# Altium PCB Encoder.PcbDoc
Units mm, origin at the board's own origin, x right, y up, seen from the top; angles counter-clockwise.
Board outline 80 x 70 mm, 2 copper layers (Top Layer, Bottom Layer), stack 1.671 mm thick; 17 components, 18 nets, 82 pads, 11 vias.
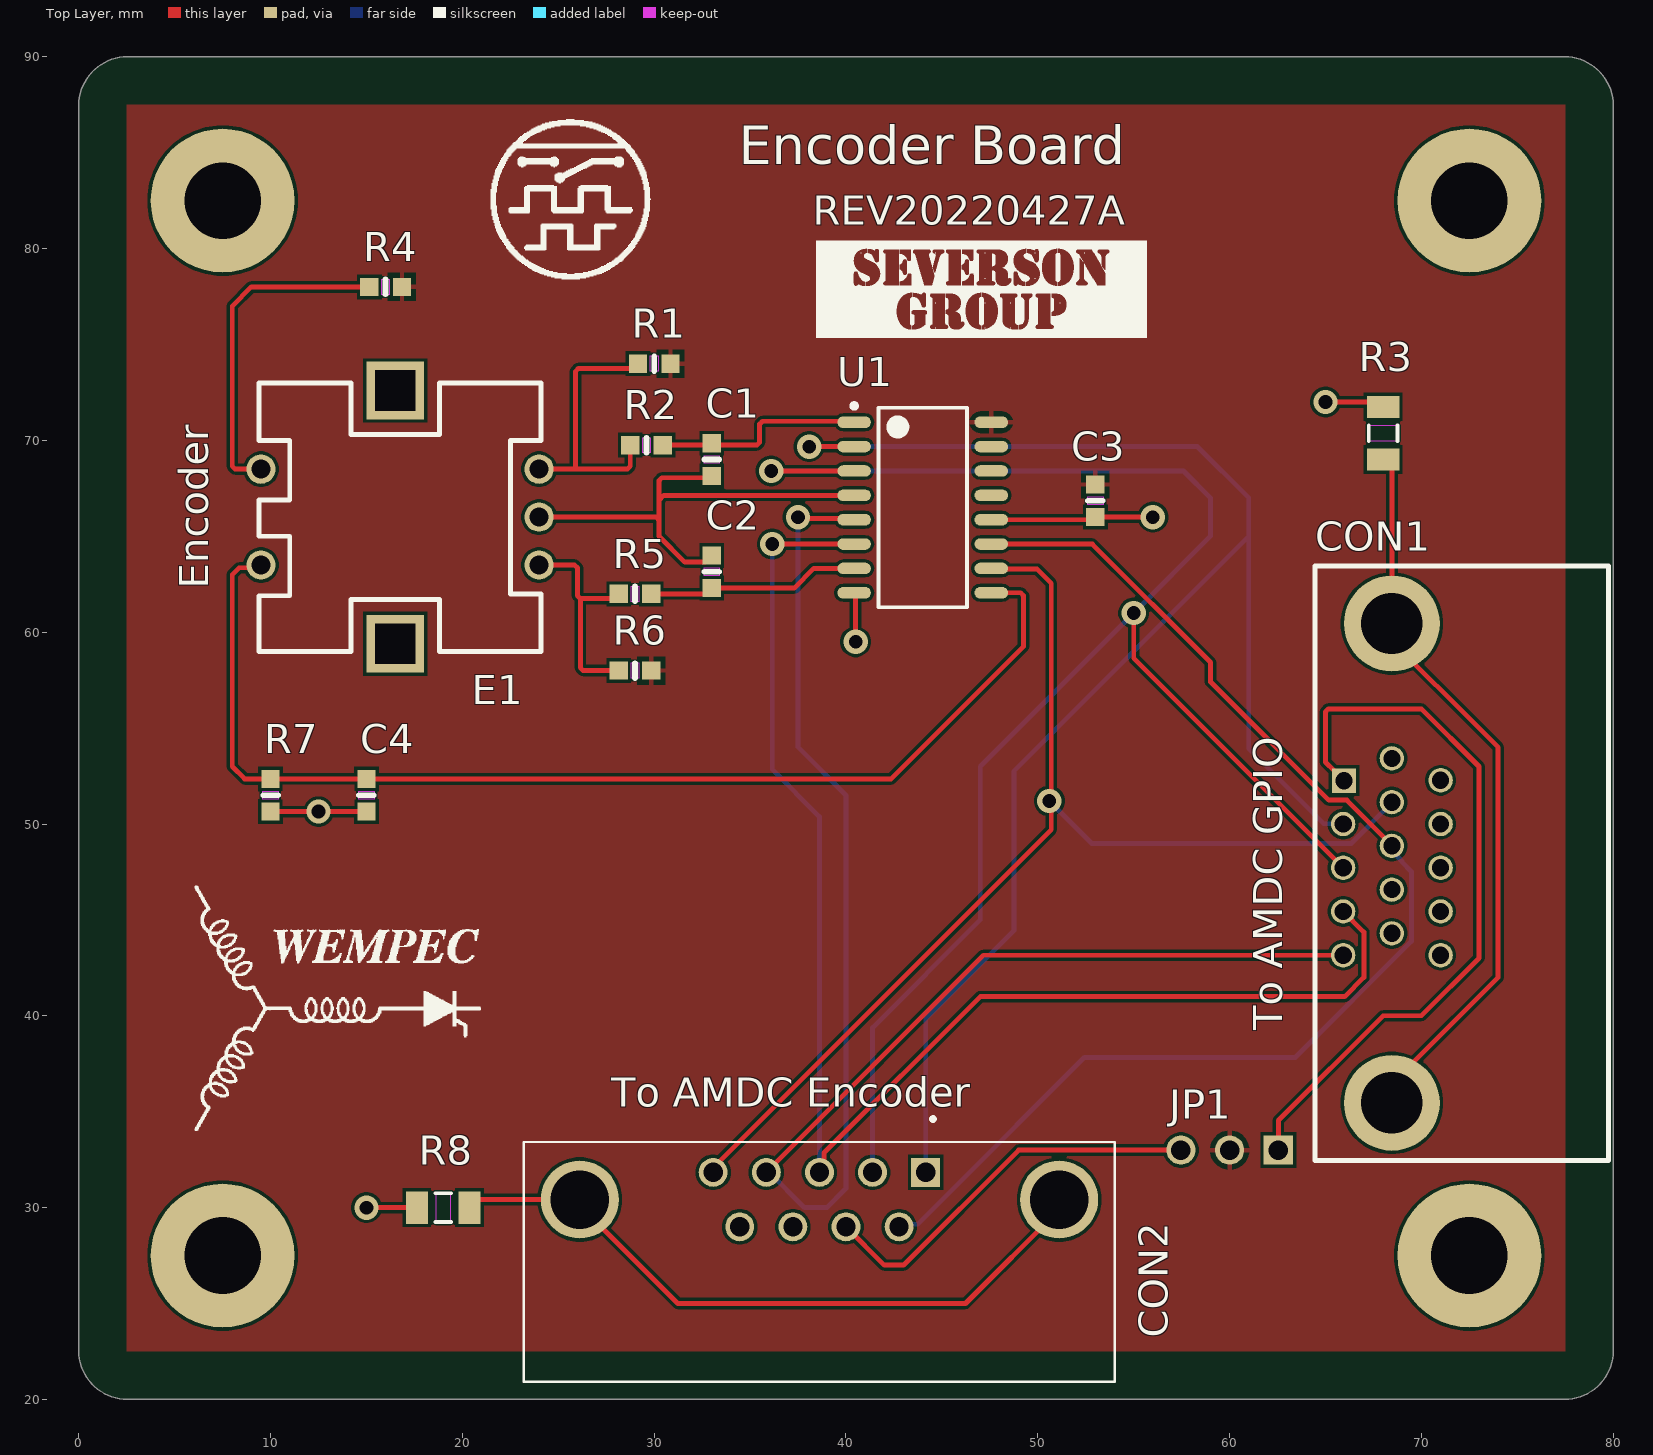
[diagram p0: Top Layer view]
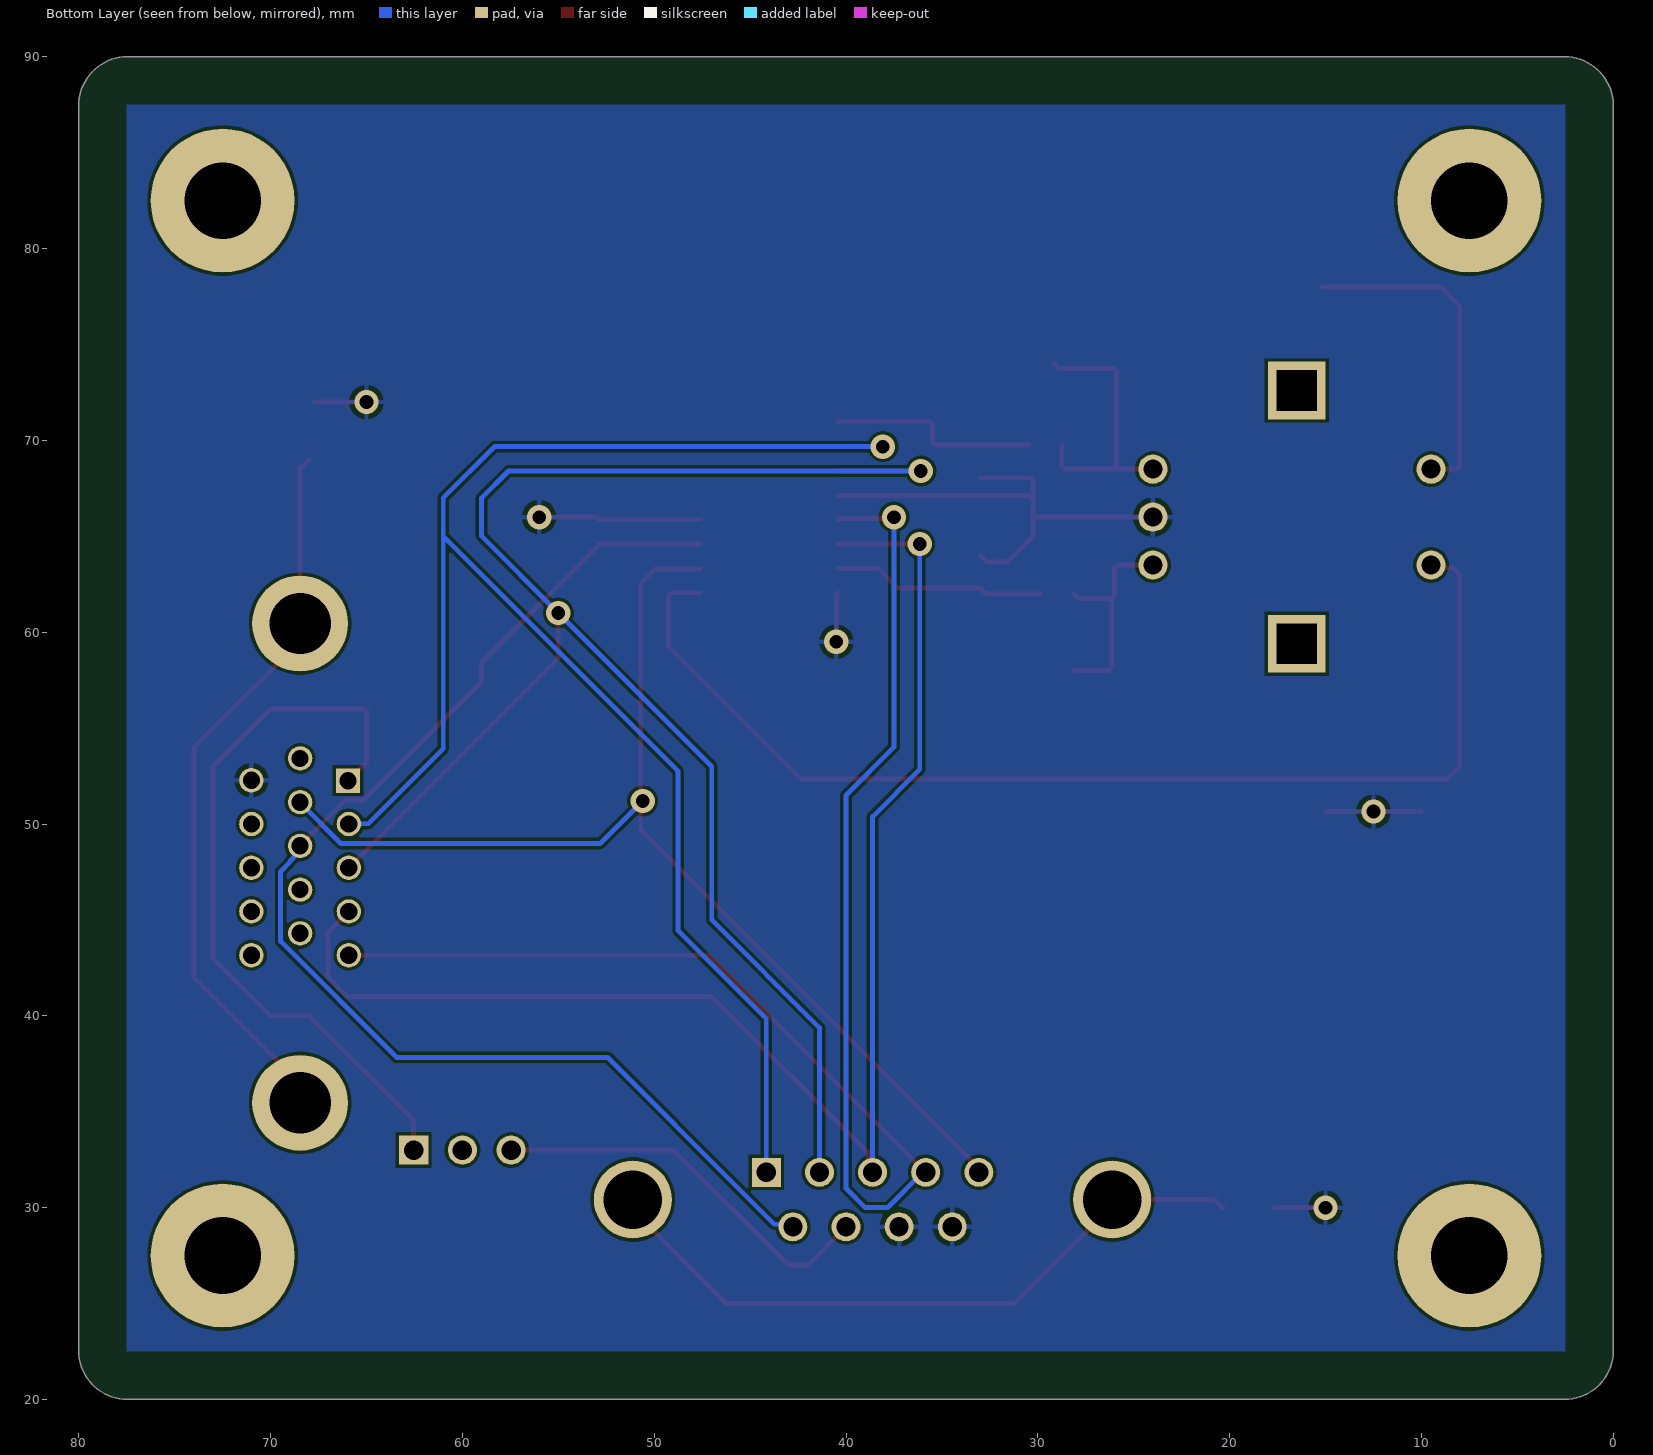
[diagram p1: Bottom Layer view, seen from below]
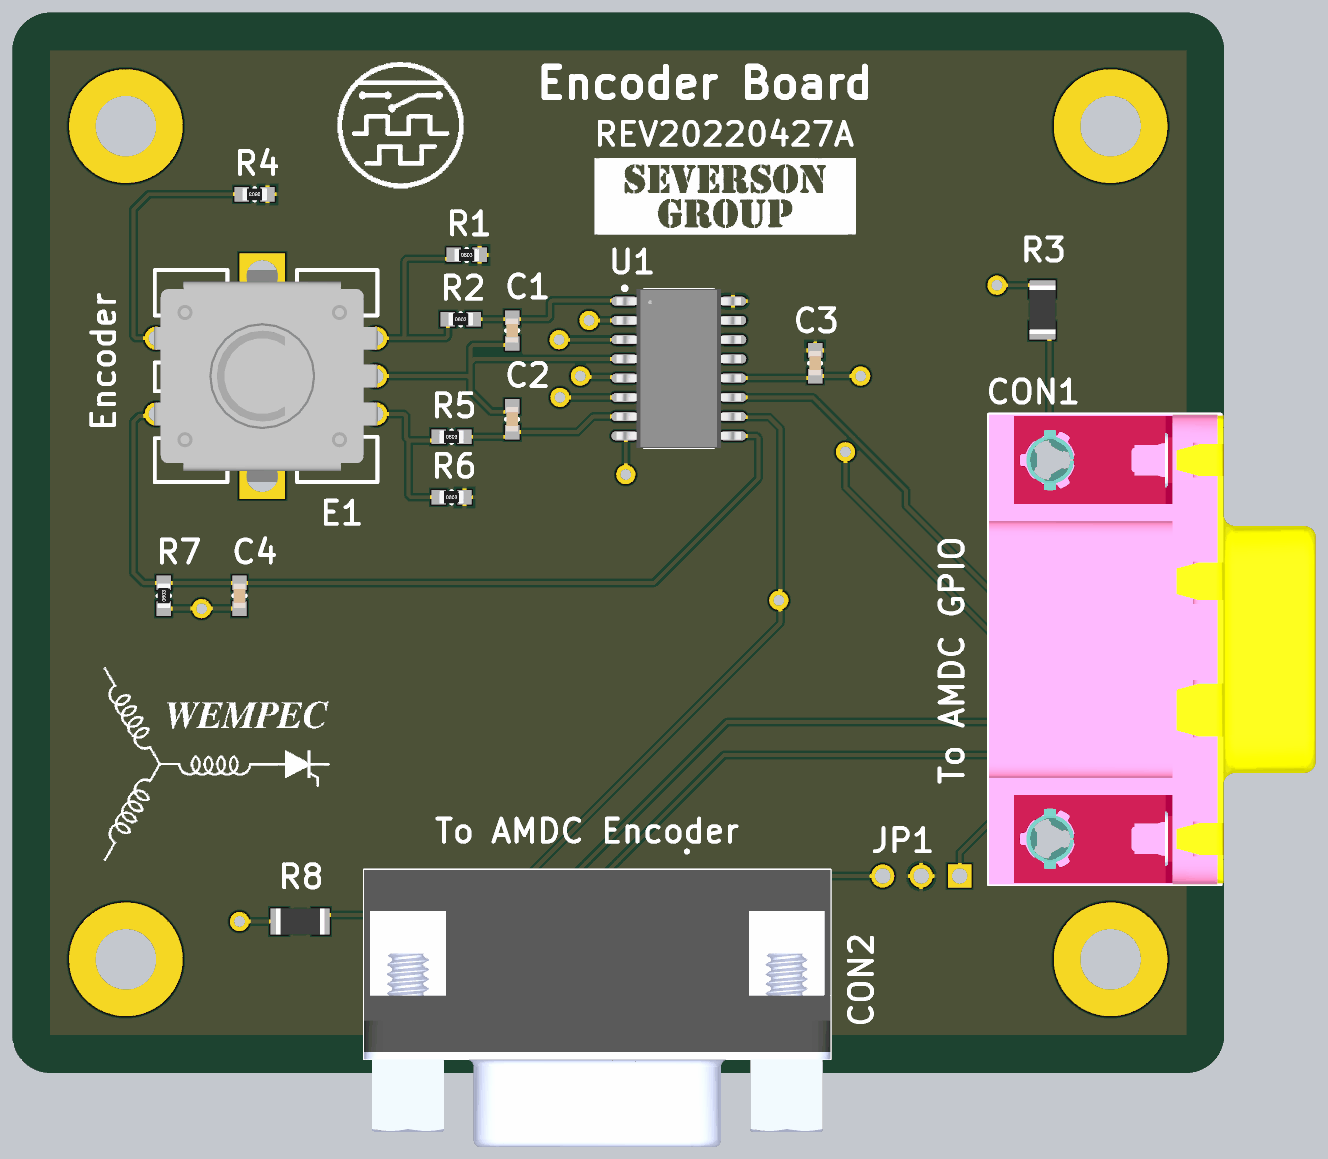
[diagram p2: 3D render of the assembled board from above, using the file's embedded part models]

## Layer stack, top to bottom
Top Solder: solder mask 0.0102, Solder Resist, Dk 3.5
Top Layer: signal copper 0.0356
Dielectric 1: dielectric 1.6, FR-4, Dk 4.8
Bottom Layer: signal copper 0.0356
Bottom Solder: solder mask 0.0102, Solder Resist, Dk 3.5

## Board outline
0,22.54 ccw(c2.54,22.54) 2.54,20 77.46,20 ccw(c77.46,22.54) 80,22.54 80,87.46 ccw(c77.46,87.46) 77.46,90 2.54,90 ccw(c2.54,87.46) 0,87.46

## Design rules (kind name [scope] priority, off if disabled: settings)
Clearance [All] p1: gap=0.16 ignorepadtopadclearanceinfootprint=FALSE
HoleSize [All] p1: absolutevalues=TRUE maxlimit=5 minlimit=0.025 maxpercent=80.000 minpercent=20.000
PolygonConnect [All] p1: connectstyle=Relief reliefconductorwidth=0.254 reliefentries=4 polygonreliefangle="90 Angle" airgapwidth=0.254
RoutingVias [All] p1: holewidth=0.3 width=0.6 viastyle="Through Hole" minholewidth=0.3 minwidth=0.6 maxholewidth=0.3 maxwidth=0.6
SilkToSolderMaskClearance [IsPad] p1: minsilkscreentomaskgap=0.128 clearancetoexposedcopper=TRUE
SolderMaskExpansion [All] p1: expansion=0.102 istentingtop=FALSE
Width [All] p1: maxlimit=0.254 minlimit=0.254 preferedwidth=0.254
28 further rules are at their usual default settings.

## Components (designator, comment, footprint, x,y, rotation, side; value= is the part's Value field where it differs from the comment)
C1 "Capacitor .1uF" ".1uF Capacitor (0603-CAP)" 33,69 r90 top
C2 "Capacitor .1uF" ".1uF Capacitor (0603-CAP)" 33,63.15 r90 top
C3 "Capacitor .1uF" ".1uF Capacitor (0603-CAP)" 53,66.85 r270 top
C4 "Capacitor .1uF" ".1uF Capacitor (0603-CAP)" 15,51.5 r270 top
CON1 "ICD15S13E6GX00LF" ICD15S 68.46,47.955 r90 top
CON2 "A-DF 09 A/KG-T2S" "DB9 Connector" 38.615,30.42 r0 top
E1 "PEC12R" Encoder 16.5,66 r90 top
JP1 "Jumper3" PIN_HEADER_1X3 60,33 r180 top
R1 "Resistor" "10K Resistor (0603-RES)" 30,74 r0 top
R2 "Resistor" "10K Resistor (0603-RES)" 29.6,69.75 r0 top
R3 "Resistor" "0 Resistor (1206-RES)" 68,70.375 r90 top
R4 "Resistor" "10K Resistor (0603-RES)" 16,78 r180 top
R5 "Resistor" "10K Resistor (0603-RES)" 29,62 r0 top
R6 "Resistor" "10K Resistor (0603-RES)" 29,58 r0 top
R7 "Resistor" "100K Resistor (0603-RES)" 10,51.5 r90 top
R8 "Resistor" "0 Resistor (1206-RES)" 19,30 r180 top
U1 "AM26C31" AM26C31 44,66.5 r0 top

## Footprints (in the part's own frame and the unit in brackets; to place one, negate y for a bottom-side part, rotate by r counter-clockwise, add the part's x,y. Pads: shape width x height; smd on the part's side, far side on the other; paste and mask are expansions set on the pad)
"0 Resistor (1206-RES)" [mm] "Chip Resistor, 2-Leads, Body 3.10x1.60mm, IPC Medium Density"
  rect 1.15x1.7 smd: 1(-1.375,0) 2(1.375,0)
  Top Layer keep-out region: -0.4,0.75 -0.4,-0.75 0.4,-0.75 0.4,0.75
  silkscreen extent -0.4,-0.75 0.4,0.75, body extent -1.6,-0.85 1.6,0.85, height 0.65
"10K Resistor (0603-RES)" [mm]
  rect 0.95x0.95 smd: 1(-0.85,0) 2(0.85,0)
  Top Layer keep-out region: -0.2,0.4 0.2,0.4 0.2,-0.4 -0.2,-0.4
  silkscreen extent 0,-0.38 0,0.38, body extent -0.8,-0.4 0.8,0.4, height 0.44
"100K Resistor (0603-RES)" [mm]
  rect 0.95x0.95 smd: 1(-0.85,0) 2(0.85,0)
  Top Layer keep-out region: -0.2,0.4 0.2,0.4 0.2,-0.4 -0.2,-0.4
  silkscreen extent 0,-0.38 0,0.38, body extent -0.8,-0.4 0.8,0.4, height 0.44
".1uF Capacitor (0603-CAP)" [mm]
  rect 0.95x0.95 smd: 1(-0.85,0) 2(0.85,0)
  Top Layer keep-out region: -0.2,0.4 0.2,0.4 0.2,-0.4 -0.2,-0.4
  silkscreen extent 0,-0.38 0,0.38, body extent -0.8,-0.4 0.8,0.4, height 0.79
AM26C31 [mm] "SOIC, 16-Leads, Body 10.20x5.30mm, Pitch 1.27mm, IPC Medium Density"
  oval 1.75x0.6 smd: 1(-3.575,4.445) 2(-3.575,3.175) 3(-3.575,1.905) 4(-3.575,0.635) 5(-3.575,-0.635) 6(-3.575,-1.905) 7(-3.575,-3.175) 8(-3.575,-4.445) 9(3.575,-4.445) 10(3.575,-3.175) 11(3.575,-1.905) 12(3.575,-0.635) 13(3.575,0.635) 14(3.575,1.905) 15(3.575,3.175) 16(3.575,4.445)
  silkscreen extent -3.7,-5.2 2.3,5.42, body extent -4.1,-5.24 4.1,5.25, height 2.01
"DB9 Connector" [mm] "ASSMANN_A-DF09A/KG-T2S"
  rect 1.508x1.508 hole 1: 1(5.54,1.42)
  round 1.508 hole 1: 2(2.77,1.42) 3(0,1.42) 4(-2.77,1.42) 5(-5.54,1.42) 6(4.155,-1.42) 7(1.385,-1.42) 8(-1.385,-1.42) 9(-4.155,-1.42)
  round 4.066 hole 3.05: SH1(-12.495,0) SH2(12.495,0)
  silkscreen extent -15.41,-9.5 15.41,4.3, body extent -15.41,-15.32 15.41,2.98, height 12.55
Encoder [mm] "PEC12R-4220F-S0024"
  round 1.524 hole 1: A(-2.5,-7.5) B(2.5,-7.5) C(0,-7.5) SW1(-2.5,7) SW2(2.5,7)
  rect 3x3 hole 2.1 square: L(-6.6,0) R(6.6,0)
  silkscreen extent -7,-7.6 7,7.1, body extent -7,-7.6 7,7.15, height 19.91
ICD15S [mm] "CONN DSUB HD RCPT 15POS R/A SLDR"
  rect 1.27x1.27 hole 0.9: 1(4.305,2.5)
  round 1.27 hole 0.9: 2(2.045,2.54) 3(-0.235,2.54) 4(-2.515,2.54) 5(-4.795,2.54) 6(5.465,0) 7(3.185,0) 8(0.905,0) 9(-1.375,0) 10(-3.655,0) 11(4.325,-2.54) 12(2.045,-2.54) 13(-0.235,-2.54) 14(-2.515,-2.54) 15(-4.795,-2.54)
  round 5 hole 3.2: SH1(12.495,0) SH2(-12.495,0)
  silkscreen extent -15.5,-11.3 15.5,4, body extent -15.5,-17.58 15.5,4, height 12.65
PIN_HEADER_1X3 [mil]
  rect 60x60 hole 40.16: 1(-100,0)
  round 60 hole 40.16: 2(0,0) 3(100,0)

## Part data
C1 C2 C3 C4: "Capacitor", Supplier Part Number 1=82AC9384, Supplier 1=Newark, Supplier 2=Digi-Key, Supplier Part Number 2=1276-1012-1-ND
CON1: "CONN D-SUB PLUG 15POS R/A SLDR", Supplier Part Number 1=609-2801-ND, Supplier 1=Digi-Key
CON2: library part "DB9 Connector A-DF_09_A/KG-T2S", "9 Position D-Sub Receptacle, Female Sockets Connector", Package=None, Supplier Part Number 1=AE10921-ND, Availability=Unavailable, Check_prices=https://www.snapeda.com/parts/A-DF%2009%20A/KG-T2S/Assmann%20WSW%20Components/view-part/2761262/?ref=eda, MF="Assmann WSW", MP="A-DF 09 A/KG-T2S", Price=None, SnapEDA_Link=https://www.snapeda.com/parts/A-DF%2009%20A/KG-T2S/Assmann%20WSW%20Components/view-part/2761262/?ref=snap, Supplier 1=Digi-Key
E1: library part PEC12R-4220F-S0024, Supplier Part Number 1=PEC12R-4220F-S0024-ND, Supplier 1=Digi-Key
JP1: Supplier Part Number 1=732-5316-ND, Supplier 1=Digi-Key
R1 R2 R4 R5 R6: library part "Resistor 10K", Supplier Part Number 1=P10.0KHCT-ND, Supplier 1=Digi-Key
R3 R8: library part "Resistor 0R", Supplier Part Number 1=311-0.0ERCT-ND, Supplier 1=Digi-Key
R7: library part "Resistor 100K", Supplier Part Number 1=311-100KLDCT-ND, Supplier 1=Digi-Key
U1: "IC DRIVER 4/0 16TSSOP", Supplier Part Number 1=296-30087-1-ND, Supplier 1=Digi-Key

## Free pads (board coordinates)
  round 7.5 hole 4: Hole1(72.5,82.5) Hole2(7.5,82.5) Hole3(7.5,27.5) Hole4(72.5,27.5)

## Via types
v1: diameter 1.27, hole 0.711, Top Layer to Bottom Layer, 11 vias

## Nets (pads, with @x,y where several pads share a name; then routed paths per layer and width w, separated by ;. In a path a pad name is that pad's centre, name@x,y a point inside that pad or via, vN(x,y) a via of type N, cw(c..) or ccw(c..) an arc to the next point about the centre after c; other vN are vias at no path point)
5V: C3.1 JP1.2 R1.2 R4.1 R6.2 U1.16
"5V DB9": CON2.7 JP1.3 | length 20.8
  Top Layer w0.254: CON2.7 42,27 43,27 49,33 JP1.3
"5V DB15": CON1.1 JP1.1 | length 38.6
  Top Layer w0.254: JP1.1 62.54,34.54 68,40 70,40 73,43 73,53 70,56 65.149,56 65,55.851 65,53.22 65.452,52.768 CON1.1@65.452,52.26
ENC_1A: CON1.2 CON2.1 U1.2 | length 86.1
  Top Layer w0.254: v1(38.075,69.675) U1.2
  Bottom Layer w0.254: v1(38.075,69.675) 58.325,69.675 61,67 61,65 ; CON2.1 44.155,39.845 48.75,44.44 48.75,52.75 61,65 ; CON1.2 65.904,50.016 64.904,50.016 61,53.92 61,65
ENC_1A\: CON1.3 CON2.2 U1.3 | length 88.1
  Top Layer w0.254: v1(36.095,68.405) U1.3 ; v1(55,61) 55,58.64 CON1.3
  Bottom Layer w0.254: v1(36.095,68.405) 57.595,68.405 59,67 59,65 v1(55,61) 47,53 47,45 41.385,39.385 CON2.2
ENC_1B: CON1.4 CON2.3 U1.6 | length 75
  Top Layer w0.254: v1(36.155,64.595) U1.6 ; CON2.3 38.855,32.08 38.855,32.855 47,41 66,41 67,42 67,44.36 CON1.4
  Bottom Layer w0.254: v1(36.155,64.595) 36.155,52.845 38.615,50.385 CON2.3
ENC_1B\: CON1.5 CON2.4 U1.5 | length 79.1
  Top Layer w0.254: CON2.4 47.165,43.16 CON1.5 ; v1(37.5,66) 37.569,65.931 40.359,65.931 U1.5
  Bottom Layer w0.254: CON2.4 35.995,31.84 37.835,30 39,30 40,31 40,51.5 37.5,54 v1(37.5,66)
ENC_1Z: CON1.7 CON2.5 U1.10 | length 61.2
  Top Layer w0.254: CON2.5 33.075,32.075 50.7,49.7 50.7,51.1 v1(50.6,51.2) 50.7,51.3 50.7,62.55 49.963,63.287 47.613,63.287 U1.10
  Bottom Layer w0.254: v1(50.6,51.2) 52.816,48.984 66.341,48.984 68.46,51.103 CON1.7
ENC_1Z\: CON1.8 CON2.6 U1.11 | length 66.3
  Top Layer w0.254: U1.11 52.842,64.595 59.005,58.432 59.005,57.407 65.167,51.244 66.113,51.244 68.46,48.897 CON1.8
  Bottom Layer w0.254: CON2.6 42.905,29.135 43.732,29.135 45.302,30.705 52.432,37.836 63.432,37.836 69.476,43.879 69.476,47.524 69,48 69,48.045 68.46,48.585 CON1.8
GND: C1.1 C2.2 C3.2 C4.2 CON1.11 CON2.8 CON2.9 E1.C R3.2 R7.1 R8.2 U1.4 U1.8 U1.12 | length 47.2
  Top Layer w0.254: R7.1 C4.2 ; v1(15,30) R8.2 ; E1.C 30.101,66 30.25,65.851 ; C2.2 32.652,63.652 31.602,63.652 30.25,65.004 30.25,65.851 ; C1.1@33,68.05 30.399,68.05 30.25,67.901 30.25,66.876 ; U1.8 40.5,61.98 v1(40.5,59.5) ; U1.4 30.509,67.135 30.25,66.876 ; U1.12 52.865,65.865 C3.2 v1(56,66) ; v1(65,72) R3.2@67.72,72 ; 30.25,65.851 30.25,66.876
  other v1: 12.5,50.65
NetC1_2: C1.2 R2.2 U1.1 | length 11.1
  Top Layer w0.254: R2.2 33,69.75 34,69.75 35.351,69.75 35.5,69.899 35.5,70.851 35.649,71 40.37,71 U1.1
NetC2_1: C2.1 R5.2 U1.7 | length 11.1
  Top Layer w0.254: R5.2 32.7,62 C2.1 37.3,62.3 38.325,63.325 U1.7
NetC4_1: C4.1 E1.SW1 R7.2 U1.9 | length 60.5
  Top Layer w0.254: E1.SW1 9.357,63.357 8.357,63.357 8,63 8,53 8.65,52.35 C4.1 42.35,52.35 47,57 49.25,59.25 49.25,61.906 49.101,62.055 U1.9
NetCON1_SH1: CON1.SH1 CON1.SH2 R3.1 | length 39.2
  Top Layer w0.254: CON1.SH2@67.46,35.46 74,42 74,54 67.55,60.45 CON1.SH1@67.46,60.45 ; R3.1 68.012,69 68.46,68.552 CON1.SH1
NetCON2_SH1: CON2.SH1 CON2.SH2 R8.1 | length 35.9
  Top Layer w0.254: R8.1 20.795,30.42 CON2.SH1 26.12,30.11 31.23,25 46.23,25 51.11,29.88 CON2.SH2
NetE1_A: E1.A R5.1 R6.1 | length 11.5
  Top Layer w0.254: E1.A 25.851,63.5 26,63.351 26,61.899 26.149,61.75 ; R6.1 26.298,58 26.149,58.149 26.149,61.75 ; R5.1 27.9,61.75 26.149,61.75
NetE1_B: E1.B R1.1 R2.1 | length 14.4
  Top Layer w0.254: E1.B 25.901,68.5 ; R2.1 28.75,68.649 28.601,68.5 25.901,68.5 ; R1.1 28.9,73.75 26.049,73.75 25.901,73.601 25.901,68.5
NetE1_SW2: E1.SW2 R4.2 | length 17.5
  Top Layer w0.254: E1.SW2 8.149,68.5 8,68.649 8,77 9,78 R4.2
pads on no net: CON1.6 CON1.9 CON1.10 CON1.12 CON1.13 CON1.14 CON1.15 E1.L E1.R U1.13 U1.14 U1.15

## Polygon pours and split planes (outlines as drawn)
GND on Bottom Layer "GND_Pour" (solid, pour order 2): 2.5,87.5 2.5,22.5 77.5,22.5 77.5,87.5
5V on Top Layer "5V_Pour" (solid, pour order 1): 2.5,87.5 2.5,22.5 77.5,22.5 77.5,87.5

## Silkscreen, mask and mechanical layers (free items; w line width, h text height)
Top Overlay:
  drawing of 32 lines, arcs and shapes, not listed
  text "Encoder Board" at 34.4,84.4 h2
  text "REV20220427A" at 38.254,81.254 h1.52
  text "To AMDC GPIO" at 62.746,39.24 h1.52 r90
  text "To AMDC Encoder" at 27.754,35.254 h1.52
Mechanical 1:
  the board outline again, w1.2

## Text inside footprints (layer, text, board x,y; h text height)
E1: Top Overlay "Encoder" at 6.746,62.254 h1.52 r90